# Altium PCB PCB1.pcbdoc (part 2 of 2)
Units mm, origin at the board's own origin, x right, y up, seen from the top; angles counter-clockwise.
Board outline 133.86 x 88.2 mm, 2 copper layers (Top Layer, Bottom Layer), stack 0.07 mm thick; 75 components, 73 nets, 338 pads, 350 vias.
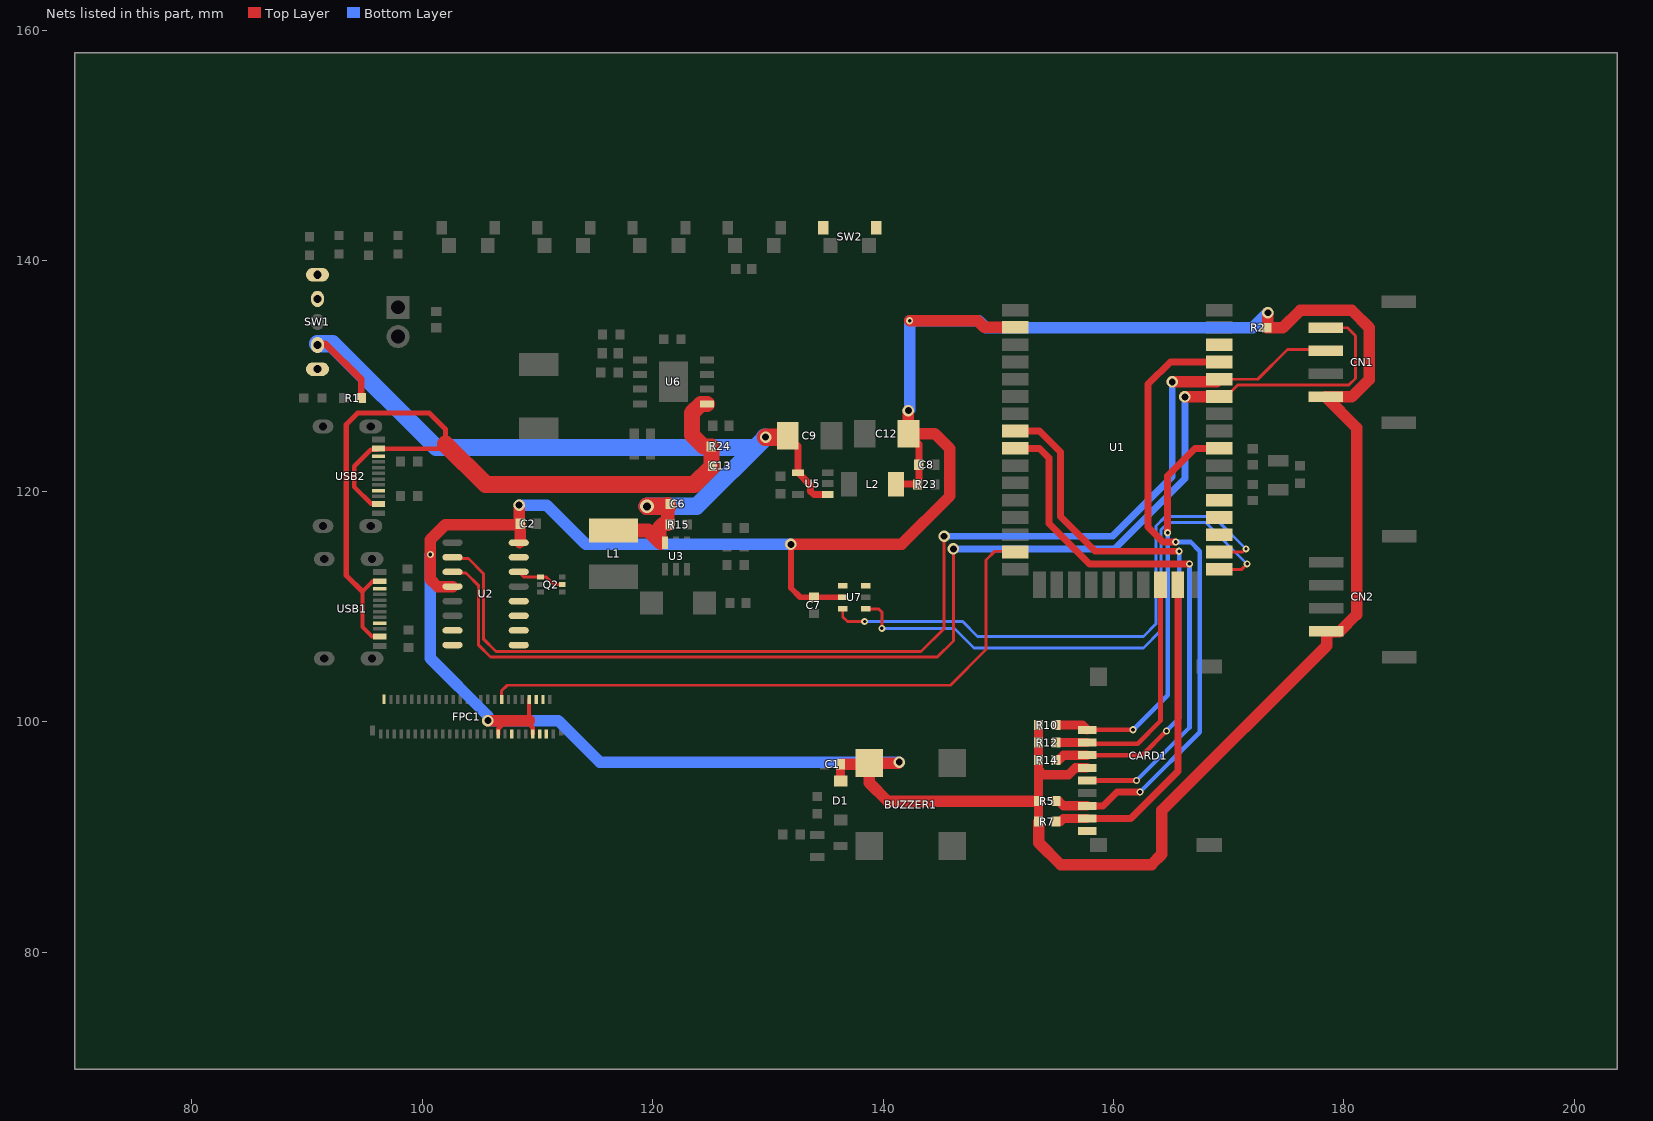
[diagram p2: the nets of this part, all layers, seen from the top]

## Via types
v1: diameter 0.62, hole 0.3, Top Layer to Bottom Layer, 295 vias
v2: diameter 0.62, hole 0.32, Top Layer to Bottom Layer, 15 vias
v3: diameter 0.63, hole 0.3, Top Layer to Bottom Layer, 14 vias
v4: diameter 0.63, hole 0.32, Top Layer to Bottom Layer, 12 vias
v5: diameter 1, hole 0.6, Top Layer to Bottom Layer, 11 vias
v6: diameter 0.62, hole 0.305, Top Layer to Bottom Layer, 2 vias
v7: diameter 1.2, hole 0.7, Top Layer to Bottom Layer, 1 vias

## Nets (pads, with @x,y where several pads share a name; then routed paths per layer and width w, separated by ;. In a path a pad name is that pad's centre, name@x,y a point inside that pad or via, vN(x,y) a via of type N, cw(c..) or ccw(c..) an arc to the next point about the centre after c; other vN are vias at no path point) (continued)
RST: Q2.1 Q2.5 U2.14 | length 4.1
  Top Layer w0.254: U2.14@108.448,112.898 108.797,112.55 Q2.1@110.249,112.55 110.767,112.55 111.417,111.9 Q2.5@112.149,111.9
SCL: U1.28 U7.3 | length 49.3
  Top Layer w0.254: U7.3@136.499,109.8 136.499,109.1 136.899,108.7 v1(138.399,108.7) ; U1.28@169.18,114.73 171.229,114.73 v1(171.499,115)
  Bottom Layer w0.254: v1(138.399,108.7) 138.41,108.689 146.91,108.689 148.199,107.4 162.599,107.4 163.699,108.5 163.699,117 164.499,117.8 168.699,117.8 v1(171.499,115)
SD_CMD: CARD1.3 R14.2 U1.8 | length 48.5
  Top Layer w0.4: CARD1.3@157.704,97.098 162.497,97.098 v2(164.599,99.2)
  Top Layer w0.6: U1.8@151.48,125.23 153.58,125.23 155.399,123.411 155.399,117.8 158.399,114.8 v2(165.699,114.8)
  Top Layer w0.8: R14.2@155.004,96.666 155.221,96.666 155.653,97.098 CARD1.3@157.704,97.098
  Bottom Layer w0.4: v2(164.599,99.2) 165.699,100.3 v2(165.699,114.8)
SD_DATA0: CARD1.7 R5.2 U1.39 | length 55.8
  Top Layer w0.6: CARD1.7@157.704,92.696 159.095,92.696 160.299,93.9 v2(162.299,93.9) ; v2(165.399,115.6) 164.299,115.6 162.999,116.9 162.999,129.3 164.929,131.23 U1.39@169.18,131.23
  Top Layer w0.8: R5.2@155.004,93.11 155.239,93.11 155.653,92.696 CARD1.7@157.704,92.696
  Bottom Layer w0.4: v2(162.299,93.9) 167.499,99.1 167.499,114.8 166.699,115.6 v2(165.399,115.6)
SD_DATA1: CARD1.8 R7.2 U1.25 | length 28.6
  Top Layer w0.6: CARD1.8@157.704,91.596 161.495,91.596 165.599,95.7 165.599,111.861 U1.25@165.58,111.88
  Top Layer w0.8: R7.2@155.004,91.332 155.389,91.332 155.653,91.596 CARD1.8@157.704,91.596
SD_DATA2: CARD1.1 R10.2 U1.34 | length 35.6
  Top Layer w0.4: CARD1.1@157.704,99.297 161.697,99.297 v2(161.699,99.3)
  Top Layer w0.6: v2(164.699,116.4) 164.699,121.349 167.08,123.73 U1.34@169.18,123.73
  Top Layer w0.8: R10.2@155.004,99.714 157.288,99.714 CARD1.1@157.704,99.297
  Bottom Layer w0.4: v2(161.699,99.3) 164.699,102.3 v2(164.699,116.4)
SD_DATA3: CARD1.2 R12.2 U1.24 | length 21.7
  Top Layer w0.4: CARD1.2@157.697,98.19 157.787,98.1 162.099,98.1 164.08,100.081 U1.24@164.08,111.88
  Top Layer w0.8: R12.2@155.004,98.19 157.697,98.19 CARD1.2@157.704,98.197
SD_SCLK: CARD1.5 U1.9 | length 47.6
  Top Layer w0.4: CARD1.5@157.704,94.898 v2@161.997,94.898
  Top Layer w0.6: U1.9@151.48,123.73 153.58,123.73 154.399,122.911 154.399,117.2 157.899,113.7 v2(166.599,113.7)
  Bottom Layer w0.4: v2(161.999,94.9) 166.599,99.5 v2(166.599,113.7)
SDA: U1.27 U7.4 | length 49.1
  Top Layer w0.254: U7.4@138.499,109.8 139.599,109.8 139.899,109.5 v1(139.899,108.1) ; U1.27@169.18,113.23 171.129,113.23 v1(171.599,113.7)
  Bottom Layer w0.254: v1(139.899,108.1) 146.199,108.1 147.899,106.4 162.599,106.4 164.105,107.906 164.105,116.64 164.765,117.3 167.999,117.3 v1(171.599,113.7)
SDO: FPC1.39
TE: FPC1.2
U0RX: CN1.2 U1.38 U2.2 | length 102.8
  Top Layer w0.254: U2.2@102.704,114.168 104.008,114.168 105.299,112.876 105.299,107.2 106.403,106.095 143.295,106.095 145.299,108.1 v5(145.299,116.1) ; U1.38@169.18,129.73 172.529,129.73 175.099,132.3 178.325,132.3 CN1.2@178.424,132.2
  Top Layer w1: v5(165.099,129.5) 168.95,129.5 U1.38@169.18,129.73
  Bottom Layer w0.6: v5(145.299,116.1) 159.899,116.1 165.099,121.3 v5(165.099,129.5)
U0TX: CN1.1 U1.37 U2.3 | length 109.8
  Top Layer w0.254: U2.3@102.704,112.898 103.801,112.898 104.893,111.806 104.893,106.631 105.918,105.606 144.705,105.606 146.099,107 v5(146.099,115) ; U1.37@169.78,128.23 170.761,129.211 180.41,129.211 180.999,129.8 180.999,133.5 180.299,134.2 CN1.1@178.424,134.2
  Top Layer w1: v5(166.199,128.2) 169.75,128.2 U1.37@169.78,128.23
  Bottom Layer w0.6: v5(146.099,115) 160.099,115 166.199,121.1 v5(166.199,128.2)
VBUS: C13.2 R24.2 U6.1 USB1.A2 USB1.A11 USB2.A2 USB2.A11 | length 78.8
  Top Layer w0.35: USB1.A11@96.312,107.4 95.64,107.4 94.797,108.243 94.797,111.297 95.699,112.199 USB1.A2@96.312,112.199
  Top Layer w0.4: USB2.A11@96.199,118.907 95.563,118.907 94.099,120.371 94.099,122.18 95.518,123.6 96.092,123.6 USB2.A2@96.199,123.707 101.619,123.707 102.005,124.093
  Top Layer w0.45: 94.797,111.297 93.399,112.695 93.399,125.8 94.399,126.8 100.599,126.8 102.005,125.393 102.005,124.093
  Top Layer w1.4: U6.1@124.707,127.595 124.194,127.595 123.399,126.8 123.399,124.9 124.399,123.9 R24.2@125.09,123.9 125.09,122.109 125.099,122.1 C13.2@125.199,122.2
  Top Layer w1.5: 102.005,124.093 105.499,120.6 123.599,120.6 C13.2@125.099,122.1
VCC: BUZZER1.1 C1.1 C2.1 C7.2 C8.2 C12.1 CARD1.4 CN1.4 CN2.4 D1.1 FPC1.35 FPC1.44 FPC1.45 L2.1 R2.2 R5.1 R7.1 R10.1 R12.1 R14.1 R23.1 U1.2 U2.4 U2.16 U7.2 | length 314.8
  Top Layer w0.3: v5@141.31,96.41 v5(141.399,96.5)
  Top Layer w0.35: 109.279,100.108 FPC1.44@109.279,101.938
  Top Layer w0.4: FPC1.35@106.576,98.935 106.576,99.384 107.195,100.003 ; 109.279,99.809 109.599,99.489 109.599,98.956 FPC1.45@109.579,98.935
  Top Layer w0.5: v5(131.999,115.4) 131.999,111.6 132.799,110.8 C7.2@133.999,110.8 U7.2@136.499,110.8
  Top Layer w0.6: C2.1@108.399,117.2 C2.1@108.499,117.1 ; L2.1@141.109,120.625 142.965,120.625 R23.1@142.99,120.6 143.099,120.709 C8.2@143.099,122.3 143.099,124.1 C12.1@142.199,125 ; CN2.4@178.463,107.851 CN2.4@178.499,107.815
  Top Layer w0.8: U2.16@108.448,115.438 108.499,115.488 U2.16@108.499,115.7 ; D1.1@136.313,94.839 C1.1@136.313,96.322 ; R7.1@153.497,91.332 R5.1@153.497,93.11 153.497,95.801 ; R10.1@153.497,99.714 R12.1@153.497,98.19 R14.1@153.497,96.666 153.497,95.801 ; CARD1.4@157.704,95.998 156.697,95.998 156.099,95.4 153.899,95.4 153.497,95.801
  Top Layer w1: U2.4@102.626,111.735 101.322,111.735 100.699,112.358 v2(100.699,114.513) 100.699,115.8 101.999,117.1 108.499,117.1 U2.16@108.499,115.7 ; v5(105.699,100.1) 107.89,100.1 ; C2.1@108.399,117.2 v5(108.399,118.8) ; v5(131.999,115.4) 141.599,115.4 145.799,119.6 145.799,123.7 144.499,125 C12.1@142.199,125 v5(142.199,127) ; C1.1@136.313,96.322 138.715,96.322 BUZZER1.1@138.803,96.41 ; v5@141.31,96.41 BUZZER1.1@138.803,96.41 ; v4(142.299,134.8) 148.21,134.8 148.78,134.23 U1.2@151.48,134.23 ; R7.1@153.497,91.332 153.497,89.501 155.399,87.6 163.299,87.6 164.199,88.5 164.199,92.3 178.499,106.6 178.499,107.815 179.614,107.815 181.099,109.3 181.099,125.525 CN1.4@178.424,128.2 180.699,128.2 182.199,129.7 182.199,134.2 180.699,135.7 176.199,135.7 174.699,134.2 R2.2@173.299,134.2 173.399,134.3 v5(173.399,135.5) ; R5.1@153.497,93.11 140.389,93.11 138.803,94.695 BUZZER1.1@138.803,96.41 ; 107.89,100.1 109.279,100.108 109.27,100.1 107.89,100.1
  Bottom Layer w1: v2(100.699,114.513) 100.699,105.5 105.699,100.5 v5(105.699,100.1) 111.799,100.1 115.399,96.5 v5(141.399,96.5) ; v5(108.399,118.8) 110.799,118.8 114.199,115.4 v5(131.999,115.4) ; v5(142.199,127) 142.299,127.1 v4(142.299,134.8) 148.299,134.8 148.899,134.2 172.099,134.2 v5(173.399,135.5)
VCC_5V: C6.1 C9.1 L1.2 R1.2 R15.2 SW1.3 U3.6 U5.1 U5.4 | length 81
  Top Layer w0.6: SW1.3@90.899,132.801 91.598,132.801 94.699,129.7 R1.2@94.699,128.1 ; C6.1@121.299,118.7 C6.1@121.499,118.9 ; C9.1@131.721,124.816 132.611,123.925 U5.4@132.611,121.613 133.699,120.525 133.699,120 133.986,119.713 U5.1@135.212,119.713
  Top Layer w1.2: L1.2@116.599,116.599 119.6,116.599 120.599,115.6 ; 120.699,115.5 120.599,115.6 ; C6.1@121.299,118.9 121.299,118.7 R15.2@121.299,117.21 ; R15.2@121.341,117.168 R15.2@121.299,117.21 ; 120.599,115.6 120.599,116.9 120.909,117.21 R15.2@121.299,117.21
  Top Layer w1.5: v7(119.499,118.7) C6.1@121.299,118.7 ; v5(129.799,124.7) 131.605,124.7 C9.1@131.721,124.816
  Bottom Layer w1.5: SW1.3@90.899,132.801 92.198,132.801 101.199,123.8 128.799,123.8 ; v7(119.499,118.7) 123.799,118.7 v5(129.799,124.7) v5@129.699,124.7
WRX: FPC1.36 U1.15 | length 54.9
  Top Layer w0.254: FPC1.36@106.879,101.938 106.879,102.679 107.367,103.168 145.841,103.168 148.931,106.258 148.931,114.032 149.699,114.8 151.41,114.8 U1.15@151.48,114.73
XL: FPC1.46
XR: FPC1.48
YD: FPC1.47
YU: FPC1.49
"": CARD1.9 SW1.1 SW1.4 SW1.5 SW2.1 SW2.2 U1.29 U1.30 U1.31 U1.40 U2.7 U2.8 U2.9 U2.10 U2.11 U2.12 U2.15 U7.1 U7.6 USB1.A3 USB1.A9 USB2.A3 USB2.A9

## Polygon pours and split planes (outlines as drawn)
GND on Bottom Layer (solid, remove dead copper, pour order 0): 76.2,76.5 196.299,76.5 196.299,151.699 76.2,151.699
GND on Top Layer (solid, remove dead copper, pour order 1): 77.258,76.2 197.357,76.2 197.357,151.399 77.258,151.399

## Keep-outs
Top Layer:
  region net "": 144.836,137.775 174.836,137.775 174.836,143.775 144.836,143.775
Bottom Layer:
  region net "": 144.791,137.877 174.791,137.877 174.791,143.877 144.791,143.877

## Other copper
Top Layer:
  region net DP: 97.337,109.2 96.887,109.2 96.887,108.9 97.337,108.9
  region net DN: 95.549,109.399 95.737,109.399 95.737,109.699 95.549,109.699
  region net DN: 97.337,109.699 96.887,109.699 96.887,109.399 97.337,109.399
  region net DN: 95.549,110.699 95.549,110.399 95.737,110.399 95.737,110.699
  region net VBUS: 95.699,112.024 95.737,111.949 95.737,112.449 95.699,112.374
  region net VBUS: 95.64,107.225 95.737,107.15 95.737,107.65 95.64,107.575
  region net BCC2: 97.155,119.684 96.774,119.707 96.774,119.407 97.155,119.43
  region net D+: 97.057,120.707 96.774,120.707 96.774,120.407 97.057,120.407
  region net D-: 95.174,121.207 95.174,120.907 95.624,120.907 95.624,121.207
  region net D+: 97.041,121.407 97.041,121.707 96.774,121.707 96.774,121.407
  region net D-: 95.174,122.207 95.174,121.907 95.624,121.907 95.624,122.207
  region net BCC1: 97.155,122.684 96.774,122.707 96.774,122.407 97.155,122.43
  region net VBUS: 97.374,123.907 96.774,123.957 96.774,123.457 97.374,123.507
  region net VBUS: 95.563,119.107 95.563,118.707 95.624,118.657 95.624,119.157
  region net VCC: 148.83,133.73 150.33,133.68 150.33,134.78 148.83,134.73
  region net IO0: 149.73,132.93 149.73,132.53 150.33,132.18 150.33,133.28
  region net IO5: 149.73,131.4 149.73,131 150.33,130.68 150.33,131.78
  region net IO4: 149.73,129.93 149.73,129.53 150.33,129.18 150.33,130.28
  region net LCD_BLK: 149.43,128.53 149.43,127.93 150.33,127.68 150.33,128.78
  region net BUZZER: 149.73,126.8 149.73,126.4 150.33,126.18 150.33,127.28
  region net SD_CMD: 153.53,125.53 152.63,125.78 152.63,124.68 153.53,124.93
  region net SD_SCLK: 153.53,124.03 152.63,124.28 152.63,123.18 153.53,123.43
  region net DB1: 150.061,121.841 150.061,121.482 150.708,121.68 150.33,122.78
  region net DB3: 149.999,120.573 150.33,120.255 150.33,121.144 149.999,120.827
  region net DB5: 149.949,119.357 149.949,119.103 150.33,118.785 150.33,119.674
  region net DB7: 149.949,117.857 149.949,117.603 150.33,117.285 150.33,118.174
  region net CSX: 149.949,116.103 150.33,115.785 150.33,116.674 149.949,116.357
  region net WRX: 149.949,114.927 149.949,114.673 150.33,114.355 150.33,115.244
  region net DCX: 151.272,112.299 151.526,112.299 151.844,112.68 150.955,112.68
  region net RESX: 153.472,110.349 153.726,110.349 154.044,110.73 153.155,110.73
  region net DB6: 154.972,110.349 155.226,110.349 155.544,110.73 154.655,110.73
  region net DB4: 156.472,110.349 156.726,110.349 157.044,110.73 156.155,110.73
  region net DB2: 157.872,110.349 158.126,110.349 158.444,110.73 157.555,110.73
  region net DB0: 159.453,110.349 159.707,110.349 160.024,110.73 159.135,110.73
  region net D-: 160.78,109.83 161.38,109.83 161.63,110.73 160.53,110.73
  region net D+: 162.28,109.83 162.88,109.83 163.13,110.73 162.03,110.73
  region net SD_DATA3: 164.28,110.13 164.63,110.73 163.53,110.73 163.88,110.13
  region net SD_DATA1: 165.299,109.83 165.899,109.83 166.13,110.73 165.03,110.73
  region net IO15: 171.83,121.23 170.33,121.28 170.33,120.18 171.83,120.23
  region net IO16: 171.83,122.73 170.33,122.78 170.33,121.68 171.83,121.73
  region net SD_DATA2: 167.13,123.43 168.03,123.18 168.03,124.28 167.13,124.03
  region net IO41: 170.711,125.357 170.33,125.674 170.33,124.785 170.711,125.103
  region net IO42: 170.711,126.857 170.33,127.174 170.33,126.285 170.711,126.603
  region net U0TX: 166.53,128.7 166.53,127.7 168.03,127.68 168.03,128.78
  region net U0TX: 170.42,129.049 169.701,128.78 170.33,128.151 170.599,128.869
  region net U0RX: 170.711,129.857 170.33,130.174 170.33,129.285 170.711,129.603
  region net SD_DATA0: 167.13,130.93 168.03,130.68 168.03,131.78 167.13,131.53
  region net EN: 170.711,134.357 170.33,134.674 170.33,133.785 170.711,134.103
  region net EN: 167.13,134.5 167.13,133.9 168.03,133.68 168.03,134.78
  region net RST: 111.468,112.027 111.468,111.773 111.849,111.69 111.849,112.11
  region net DTR: 111.468,111.377 111.468,111.123 111.849,111.04 111.849,111.46
  region net IO0: 110.499,110.29 110.549,111.04 109.949,111.04 109.999,110.29
  region net DTR: 110.767,112.027 110.549,112.11 110.549,111.69 110.767,111.773
  region net DTR: 109.568,111.773 109.949,111.69 109.949,112.11 109.568,112.027
  region net RST: 109.568,112.423 109.949,112.34 109.949,112.76 109.568,112.677
  region net RST: 110.767,112.677 110.549,112.76 110.549,112.34 110.767,112.423
  region net U0RX: 103.879,114.295 103.219,114.555 103.219,113.995 103.754,114.041
  region net U0TX: 103.801,113.025 103.219,113.285 103.219,112.725 103.754,112.771
  region net DP: 102.281,110.147 102.493,109.935 103.219,110.185 102.034,110.185
  region net VCC: 107.999,117.1 107.779,115.825 108.964,115.825 108.999,117.1
  region net RST: 108.707,112.46 108.886,112.639 108.964,112.725 107.779,112.725
  region net $1N5106: 92.903,128.5 91.703,128.5 91.703,127.7 92.903,127.7
  region net VCC_5V: 94.999,129.432 94.399,129.432 94.296,128.532 95.102,128.532
  region net $1N5106: 91.589,128.5 91.589,127.7 92.789,127.668 92.789,128.532
  region net DB0: 98.903,98.154 98.926,98.535 98.626,98.535 98.649,98.154
  region net DB1: 98.951,102.721 98.929,102.34 99.228,102.34 99.205,102.721
  region net DB2: 99.505,98.154 99.528,98.535 99.228,98.535 99.251,98.154
  region net DB3: 99.553,102.719 99.531,102.338 99.83,102.338 99.807,102.719
  region net DB4: 100.105,98.154 100.127,98.535 99.828,98.535 99.851,98.154
  region net DB5: 100.153,102.721 100.13,102.34 100.43,102.34 100.407,102.721
  region net DB6: 100.704,98.152 100.727,98.533 100.427,98.533 100.45,98.152
  region net DB7: 100.752,102.719 100.729,102.338 101.029,102.338 101.006,102.719
  region net RESX: 106.104,98.154 106.127,98.535 105.827,98.535 105.85,98.154
  region net CSX: 106.172,102.719 106.129,102.338 106.429,102.338 106.426,102.719
  region net WRX: 106.752,102.679 106.729,102.338 107.029,102.338 107.006,102.679
  region net DCX: 107.303,98.154 107.326,98.535 107.026,98.535 107.049,98.154
  region net LEDA: 112.13,101.638 112.13,102.238 111.23,102.338 111.23,101.538
  region net IO16: 175.756,123.149 175.199,123.15 175.199,122.149 175.756,122.149
  region net IO15: 175.649,120.65 175.199,120.65 175.199,119.65 175.649,119.65
  region net IO0: 118.699,140.4 119.099,140.4 119.474,140.675 118.276,140.675
  region net EN: 127.449,139.925 127.749,140.675 126.551,140.675 126.949,139.925
  region net IO4: 102.499,140.075 102.924,140.675 101.725,140.675 102.099,140.075
  region net IO5: 110.799,140.1 111.199,140.675 110,140.675 110.399,140.1
  region net EN: 126.949,138.3 127.449,138.3 127.599,138.85 126.799,138.85
  region net EN: 127.449,140.5 126.949,140.5 126.799,139.75 127.599,139.75
  region net SD_DATA2: 159.104,99.497 158.504,99.648 158.504,98.947 159.104,99.097
  region net SD_DATA3: 159.104,97.9 159.104,98.3 158.504,98.548 158.504,97.847
  region net SD_CMD: 159.104,96.898 159.104,97.298 158.504,97.448 158.504,96.747
  region net SD_SCLK: 159.104,95.098 158.504,95.249 158.504,94.548 159.104,94.698
  region net SD_DATA0: 159.095,92.996 158.504,93.046 158.504,92.345 159.095,92.396
  region net SD_DATA1: 159.404,91.896 158.504,91.947 158.504,91.246 159.404,91.296
  region net VCC: 153.097,91.478 153.897,91.478 153.901,92.678 153.094,92.678
  region net VCC: 153.097,94.742 153.094,93.542 153.901,93.542 153.897,94.742
  region net VCC: 153.097,92.964 153.094,91.764 153.901,91.764 153.897,92.964
  region net SD_DATA2: 156.607,100.114 155.407,100.146 155.407,99.282 156.607,99.314
  region net VCC: 153.897,98.19 153.901,99.282 153.094,99.282 153.097,98.19
  region net SD_DATA3: 156.607,98.59 155.407,98.622 155.407,97.758 156.607,97.79
  region net VCC: 153.897,96.666 153.901,97.758 153.094,97.758 153.097,96.666
  region net VCC: 153.897,99.714 153.097,99.714 153.094,98.622 153.901,98.622
  region net VCC: 153.897,98.19 153.097,98.19 153.094,97.098 153.901,97.098
  region net VCC: 153.097,95.801 153.897,95.801 153.901,96.234 153.094,96.234
  region net EN: 171.008,134.357 171.008,134.103 171.389,133.785 171.389,134.632
  region net BCC1: 97.315,122.684 97.315,122.43 97.696,122.168 97.696,123.002
  region net BCC2: 97.315,119.684 97.315,119.43 97.696,119.168 97.696,120.002
  region net $1N25025: 134.697,91.71 133.897,91.71 133.672,90.51 134.922,90.51
  region net $1N25027: 136.713,90.76 135.913,90.76 135.672,89.56 136.922,89.56
  region net $1N25025: 134.257,90.6 133.202,90.632 133.202,89.768 134.257,89.8
  region net $1N25025: 134.697,90.4 134.713,91.6 133.849,91.6 133.897,90.4
  region net BUZZER: 133.425,94.084 133.849,93.914 134.713,93.914 133.736,94.338
  region net $1N25027: 136.713,89.779 136.888,90.979 135.738,90.979 135.913,89.779
  region net VCC: 136.713,96.322 135.913,96.322 135.738,95.314 136.888,95.314
  region net U0TX: 180.299,134.073 180.299,134.327 179.924,134.644 179.924,133.755
  region net U0RX: 176.543,132.427 176.543,132.173 176.924,131.855 176.924,132.65
  region net IO42: 179.002,114.569 178.284,114.3 179.541,114.3 179.362,114.569
  region net IO41: 176.582,111.978 176.582,111.724 176.963,111.407 176.963,112.296
  region net VCC: 178.999,106.6 179.963,107.401 176.963,107.401 177.999,106.6
  region net $1N31228: 119.499,112.9 118.898,111.299 120.897,111.299 120.699,112.9
  region net $1N31228: 117.698,110.384 117.698,109.584 118.898,109.3 118.898,111.299
  region net LEDA: 126.247,110.55 125.497,111.175 125.497,109.425 126.247,110.05
  region net $1N31228: 116.999,111 117.999,111.539 115.199,111.539 116.199,111
  region net VCC_5V: 119.6,117.199 118.708,117.66 118.708,115.537 119.6,115.999
  region net LCD_BLK: 123.399,115.54 123.402,116.668 122.596,116.668 122.599,115.54
  region net LCD_BLK: 126.146,118.132 126.042,117.232 126.849,117.232 126.746,118.132
  region net LEDK: 126.146,113.868 126.746,113.868 126.849,114.768 126.042,114.768
  region net LEDK: 126.146,114.932 126.042,114.032 126.849,114.032 126.746,114.932
  region net LEDA: 125.549,110.55 125.549,110.05 126.299,109.85 126.299,110.75
  region net LEDA: 126.949,109.1 127.099,109.85 126.299,109.85 126.449,109.1
  region net FB: 133.748,119 133.111,119.413 132.111,119.413 133.123,118.776
  region net VCC_5V: 132.911,122.813 132.311,122.813 132.111,121.913 133.111,121.913
  region net VCC_5V: 133.748,120.9 133.111,121.313 132.111,121.313 133.123,120.676
  region net VCC_5V: 133.986,120.013 133.986,119.413 134.712,119.413 134.712,120.013
  region net VCC: 143.399,123.65 142.799,123.65 142.699,122.75 143.499,122.75
  region net VCC: 143.399,120.95 143.499,121.85 142.699,121.85 142.799,120.95
  region net FB: 144.799,120.95 144.899,121.85 144.099,121.85 144.199,120.95
  region net FB: 144.197,119.797 144.797,119.797 144.9,120.168 144.093,120.168
  region net FB: 144.799,121.932 144.199,121.932 144.093,121.032 144.9,121.032
  region net VCC: 141.687,120.925 141.687,120.325 142.587,120.168 142.587,121.032
  region net VCC: 144.499,125.5 143.149,126.187 143.149,123.812 144.499,124.5
  region net VCC: 142.699,127 141.699,127 141.249,126.187 143.149,126.187
  region net VCC_5V: 129.799,125.45 129.799,123.95 130.771,123.628 130.771,126.003
  region net ACC1: 97.742,111.875 97.742,111.525 98.267,111.343 98.267,112.149
  region net ACC2: 97.986,108.123 97.986,107.869 98.367,107.551 98.367,108.356
  region net IO15: 175.296,120.503 176.003,119.796 176.631,120.296 175.767,120.296
  region net IO16: 176.11,123.003 175.403,122.296 175.767,122.61 176.631,122.61
  region net VCC_5V: 91.598,133.101 91.449,132.85 91.449,132.55 91.598,132.501
  region net $1N88053: 126.915,125.232 126.315,125.232 126.193,124.332 127,124.332
  region net $1N88053: 126.915,124.35 127.015,125.25 126.215,125.25 126.315,124.35
  region net $1N92749: 98.029,139.818 98.302,140.199 97.501,140.199 97.775,139.818
  region net $1N92749: 96.601,140.299 97.501,140.199 97.501,140.999 96.601,140.899
  region net $1N103155: 98.566,142.012 98.296,142.599 97.971,141.799 98.566,141.653
  region net $1N103155: 96.596,141.899 97.496,141.799 97.496,142.599 96.596,142.499
  region net $1N103155: 96.623,141.899 96.623,142.499 95.723,142.5 95.723,141.7
  region net $1N92749: 96.628,140.299 96.628,140.899 94.928,140.9 94.928,140.099
  region net $1N92749: 94.028,140.299 94.928,140.099 94.928,140.9 94.028,140.899
  region net $1N92749: 91.475,140.299 92.375,140.199 92.375,140.999 91.475,140.899
  region net $1N92749: 94.075,140.299 94.075,140.899 93.175,140.999 93.175,140.199
  region net $1N108049: 91.47,141.899 92.37,141.799 92.37,142.599 91.47,142.499
  region net $1N108049: 93.26,142.868 92.541,142.599 93.17,141.97 93.439,142.689
  region net $1N108049: 91.496,141.899 91.496,142.499 90.596,142.5 90.596,141.7
  region net $1N92749: 91.502,140.299 91.502,140.899 90.602,140.9 90.602,140.099
  region net $1N92749: 121.073,134.013 120.819,134.013 120.542,133.632 121.349,133.632
  region net $1N106824: 123.756,133.5 122.856,133.632 122.856,132.768 123.756,132.9
  region net $1N103155: 125.688,128.992 125.307,129.165 125.307,128.565 125.688,128.738
  region net $1N108049: 125.534,130.008 125.534,130.262 125.307,130.435 125.307,129.835
  region net $1N106824: 125.007,132.291 124.407,132.291 124.107,131.705 125.307,131.705
  region net $1N108835: 114.342,133.9 114.342,133.3 115.242,133.168 115.242,134.032
  region net $1N108835: 135.175,139.925 135.675,139.925 136.025,140.675 134.826,140.675
  region net $1N120907: 112.693,125.994 111.801,126.393 111.801,124.394 112.693,124.794
  region net BAT+: 110.649,133.5 109.349,133.5 108.4,131.991 111.801,131.991
  region net BAT+: 99.129,136.62 98.898,136.969 98.898,134.97 99.129,135.32
  region net DP: 97.542,110.626 97.378,110.323 97.753,110.274 98.003,110.567
  region net DP: 97.566,110.595 97.649,110.273 97.949,110.273 98.031,110.595
  region net DP: 97.607,110.556 97.862,110.275 98.221,110.341 98.065,110.64
  region net DP: 97.732,109.202 97.363,109.2 97.197,108.9 97.507,108.795
  region net $1N103155: 121.218,135.609 120.916,135.762 120.737,135.582 120.89,135.28
  region net $1N103155: 125.669,129.107 125.358,128.992 125.387,128.738 125.722,128.645
  region net D-: 94.566,121.395 94.649,121.2 94.949,121.2 95.031,121.395
  region net D-: 95.038,121.797 95.062,121.951 94.814,122.126 94.573,121.812
  region net D+: 97.024,120.883 96.95,120.663 97.216,120.504 97.476,120.772
  region net D+: 97.507,121.256 97.258,121.552 96.935,121.451 97.045,121.204
  region net IO0: 132.107,133.363 132.434,133.4 132.434,133.8 132.107,133.836
  region net IO0: 131.691,133.836 131.363,133.8 131.363,133.4 131.691,133.363
  region net U0RX: 144.924,115.769 145.172,115.25 145.426,115.25 145.674,115.769
  region net U0TX: 145.724,114.669 145.972,114.15 146.226,114.15 146.474,114.669
  region net BUZZER: 133.166,98.695 133.199,98.373 133.599,98.373 133.631,98.695
  region net SD_DATA2: 161.492,99.531 161.171,99.497 161.173,99.097 161.496,99.066
  region net SD_CMD: 164.29,99.219 164.085,98.968 164.368,98.686 164.618,98.89
  region net SD_SCLK: 161.793,95.131 161.471,95.098 161.473,94.698 161.795,94.666
  region net VCC: 180.641,126.69 179.924,127.75 176.924,127.75 179.227,126.69
  region net $1N25027: 136.403,89.61 136.403,88.81 137.603,88.011 137.603,90.411
  region net VCC: 139.303,94.695 140.003,95.21 137.603,95.21 138.303,94.695
  region net VCC: 141.31,96.91 140.003,97.61 140.003,95.21 141.31,95.91
  region net VCC: 136.313,96.822 136.313,95.822 137.603,95.21 137.603,97.61
  region net FB: 132.431,120.1 131.531,120.203 131.531,119.396 132.431,119.5
  region net LX: 136.279,121.825 135.855,121.4 136.355,119.564 137.479,121.685
  region net VCC: 142.709,120.925 141.809,121.675 141.809,119.575 142.709,120.325
Bottom Layer:
  region net DP: 97.566,110.595 97.624,110.273 97.974,110.273 98.031,110.595
  region net DP: 98.031,109.105 97.974,109.427 97.624,109.427 97.566,109.105
  region net $1N103155: 121.18,134.99 121.482,134.837 121.661,135.017 121.508,135.319
  region net $1N103155: 126.131,129.105 126.026,129.427 125.772,129.427 125.666,129.105
  region net BUZZER: 133.631,99.105 133.599,99.427 133.199,99.427 133.166,99.105
  region net SD_CMD: 165.467,114.595 165.499,114.273 165.899,114.273 165.932,114.595
  region net SD_SCLK: 166.367,113.495 166.399,113.173 166.799,113.173 166.832,113.495
  region net SD_DATA0: 165.604,115.367 165.926,115.4 165.926,115.8 165.604,115.832
  region net SD_CMD: 164.908,99.18 165.113,99.431 164.83,99.714 164.58,99.509
  region net SD_SCLK: 162.308,94.88 162.513,95.131 162.23,95.414 161.98,95.209
  region net SD_DATA0: 162.608,93.88 162.813,94.131 162.53,94.414 162.28,94.209

## Silkscreen, mask and mechanical layers (free items; w line width, h text height)
Top Silkscreen Layer:
  text "75%" at 92.644,143.022 h0.65
  text "50%" at 95.344,143.022 h0.65
  text "25%" at 97.844,143.022 h0.65
  text "100%" at 89.915,142.922 h0.65
  text "RES" at 130.544,139.322 h0.65
  text "ENTER" at 102.287,139.222 h0.65
  text "CONTROL" at 110.13,139.222 h0.65
  text "CONTROL" at 118.354,139.222 h0.65
  text "ELECTRIC" at 134.726,139.222 h0.65
  text "+" at 94.399,135.359 h1.96
  text "-" at 94.399,132.559 h1.96
  text "JLCJLCJLCJLC" at 165.866,91.032 h0.97 r90
Bottom Silkscreen Layer:
  text "V2.0" at 179.489,93.355 h1.62
  text "By:小辉辉" at 183.528,89.527 h3.4
  text "20220919" at 142.504,89.055 h1.62
Mechanical 1:
  lines w0.025 net "": 93.973,84.689 113.531,84.689 113.531,89.388 93.973,89.388 93.973,84.689
  lines w0.254 net "": 88.639,88.923 88.639,141.331 cw(c91.179,141.331) 91.179,143.871 184.099,143.871 cw(c184.099,141.331) 186.639,141.331 186.639,88.911 cw(c184.099,88.911) 184.098,86.371 94.506,86.4 ccw(c94.505,83.86) 94.492,86.4 91.192,86.383 cw(c91.179,88.923) 88.639,88.923
Mechanical 6:
  text "上方区域挖槽" at 95.019,80.246 h3.45
  text "客编" at 159.894,77.737 h3.45

## Text inside footprints (layer, text, board x,y; h text height)
BUZZER1: Top Silkscreen Layer "+" at 139.903,94.257 h1.33